# EAGLE board CT_schematic (EAGLE 7.6.0)

Size 100 x 80 mm. Coordinates in mm from the lower left corner, seen from the top.
Outline: 0,0 100,0 100,80 0,80 0,0
Copper layers (1*16): Top 0.035mm / dielectric 1.5mm / Bottom 0.035mm
Design rules "default": minimum track width 10mil, minimum drill 24mil, track to track 8mil, track to pad 8mil, pad to pad 8mil, via to via 8mil, smd to smd 8mil, copper to edge 40mil, drill to drill 8mil, minimum pad ring 10mil, minimum via ring 8mil, stop-mask expansion 4mil, vias tented up to drill 0mil, thermal gap 10mil

## Footprints (pad centres in the part's own frame; a part is rotated, then mirrored left to right if it is on the bottom)
C0603 = smd 0.8 x 0.8: 1 -0.762,0; 2 0.762,0
C0402 = smd 0.5 x 0.5: 1 -0.508,0; 2 0.508,0
C1210 = smd 1.2 x 2.5: 1 -1.524,0; 2 1.524,0
C0805 = smd 1.2 x 1.3: 1 -1.016,0; 2 1.016,0
EXV-9H = smd 3.505 x 1.676: 1 -2.857,0; 2 2.857,0
L0603 = smd 0.8 x 0.8: 1 -0.762,0; 2 0.762,0
PJ-037B_PACKAGE = drill 3.7 square: 1 12,0 | drill 3.2 square: 2 6,0
R0603 = smd 0.8 x 0.8: 1 -0.762,0; 2 0.762,0
LQFP100 = smd 0.3 x 1.2: 1 -6,-7.75; 2 -5.5,-7.75; 3 -5,-7.75; 4 -4.5,-7.75; 5 -4,-7.75; 6 -3.5,-7.75; 7 -3,-7.75; 8 -2.5,-7.75; 9 -2,-7.75; 10 -1.5,-7.75; 11 -1,-7.75; 12 -0.5,-7.75; 13 0,-7.75; 14 0.5,-7.75; 15 1,-7.75; 16 1.5,-7.75; 17 2,-7.75; 18 2.5,-7.75; 19 3,-7.75; 20 3.5,-7.75; 21 4,-7.75; 22 4.5,-7.75; 23 5,-7.75; 24 5.5,-7.75; 25 6,-7.75; 51 6,7.75; 52 5.5,7.75; 53 5,7.75; 54 4.5,7.75; 55 4,7.75; 56 3.5,7.75; 57 3,7.75; 58 2.5,7.75; 59 2,7.75; 60 1.5,7.75; 61 1,7.75; 62 0.5,7.75; 63 0,7.75; 64 -0.5,7.75; 65 -1,7.75; 66 -1.5,7.75; 67 -2,7.75; 68 -2.5,7.75; 69 -3,7.75; 70 -3.5,7.75; 71 -4,7.75; 72 -4.5,7.75; 73 -5,7.75; 74 -5.5,7.75; 75 -6,7.75 | smd 1.2 x 0.3: 26 7.75,-6; 27 7.75,-5.5; 28 7.75,-5; 29 7.75,-4.5; 30 7.75,-4; 31 7.75,-3.5; 32 7.75,-3; 33 7.75,-2.5; 34 7.75,-2; 35 7.75,-1.5; 36 7.75,-1; 37 7.75,-0.5; 38 7.75,0; 39 7.75,0.5; 40 7.75,1; 41 7.75,1.5; 42 7.75,2; 43 7.75,2.5; 44 7.75,3; 45 7.75,3.5; 46 7.75,4; 47 7.75,4.5; 48 7.75,5; 49 7.75,5.5; 50 7.75,6; 76 -7.75,6; 77 -7.75,5.5; 78 -7.75,5; 79 -7.75,4.5; 80 -7.75,4; 81 -7.75,3.5; 82 -7.75,3; 83 -7.75,2.5; 84 -7.75,2; 85 -7.75,1.5; 86 -7.75,1; 87 -7.75,0.5; 88 -7.75,0; 89 -7.75,-0.5; 90 -7.75,-1; 91 -7.75,-1.5; 92 -7.75,-2; 93 -7.75,-2.5; 94 -7.75,-3; 95 -7.75,-3.5; 96 -7.75,-4; 97 -7.75,-4.5; 98 -7.75,-5; 99 -7.75,-5.5; 100 -7.75,-6
SOIC-8 = smd 1.6 x 0.6: 1 -2.7,1.905 | smd 1.55 x 0.6: 2 -2.7,0.635; 3 -2.7,-0.635; 4 -2.7,-1.905; 5 2.7,-1.905; 6 2.7,-0.635; 7 2.7,0.635; 8 2.7,1.905
QFN-32 = smd 0.6 x 0.3: 1 -2.3,1.75; 2 -2.3,1.25; 3 -2.3,0.75; 4 -2.3,0.25; 5 -2.3,-0.25; 6 -2.3,-0.75; 7 -2.3,-1.25; 8 -2.3,-1.75; 17 2.3,-1.75; 18 2.3,-1.25; 19 2.3,-0.75; 20 2.3,-0.25; 21 2.3,0.25; 22 2.3,0.75; 23 2.3,1.25; 24 2.3,1.75 | smd 0.3 x 0.6: 9 -1.75,-2.3; 10 -1.25,-2.3; 11 -0.75,-2.3; 12 -0.25,-2.3; 13 0.25,-2.3; 14 0.75,-2.3; 15 1.25,-2.3; 16 1.75,-2.3; 25 1.75,2.3; 26 1.25,2.3; 27 0.75,2.3; 28 0.25,2.3; 29 -0.25,2.3; 30 -0.75,2.3; 31 -1.25,2.3; 32 -1.75,2.3 | smd 3.2 x 3.2: EXP 0,0
SJ-43515TS-SMT-TR = smd 2.2 x 3: 1 0.6,-7.4; 4 3.4,-7.4 | smd 3 x 3: 2 12.8,-7.4; 5 17,-3 | smd 2 x 3: 3 5.3,0; 6 2.5,0 | drill 1.8: P$7 4.5,-3.69; P$8 11.54,-3.69
WM-64PC = drill 0.6 pad 1: 1 -1,0.95; 2 -1,-0.95
SSOP-28 = smd 1.5 x 0.4: 1 -3.625,4.225; 2 -3.625,3.575; 3 -3.625,2.925; 4 -3.625,2.275; 5 -3.625,1.625; 6 -3.625,0.975; 7 -3.625,0.325; 8 -3.625,-0.325; 9 -3.625,-0.975; 10 -3.625,-1.625; 11 -3.625,-2.275; 12 -3.625,-2.925; 13 -3.625,-3.575; 14 -3.625,-4.225; 15 3.625,-4.225; 16 3.625,-3.575; 17 3.625,-2.925; 18 3.625,-2.275; 19 3.625,-1.625; 20 3.625,-0.975; 21 3.625,-0.325; 22 3.625,0.325; 23 3.625,0.975; 24 3.625,1.625; 25 3.625,2.275; 26 3.625,2.925; 27 3.625,3.575; 28 3.625,4.225
HTSS-105-01-G-D = drill 1 pad 1.8 square: 1 0,0 | drill 1 pad 1.8: 2 0,2.54; 3 2.54,0; 4 2.54,2.54; 5 5.08,0; 6 5.08,2.54; 7 7.62,0; 8 7.62,2.54; 9 10.16,0; 10 10.16,2.54
QFN-28 = smd 0.813 x 0.305: 1 -2.451,1.5; 2 -2.451,1; 3 -2.451,0.5; 4 -2.451,0; 5 -2.451,-0.5; 6 -2.451,-1; 7 -2.451,-1.5; 15 2.451,-1.5; 16 2.451,-1; 17 2.451,-0.5; 18 2.451,0; 19 2.451,0.5; 20 2.451,1; 21 2.451,1.5 | smd 0.305 x 0.813: 8 -1.5,-2.451; 9 -1,-2.451; 10 -0.5,-2.451; 11 0,-2.451; 12 0.5,-2.451; 13 1,-2.451; 14 1.5,-2.451; 22 1.5,2.451; 23 1,2.451; 24 0.5,2.451; 25 0,2.451; 26 -0.5,2.451; 27 -1,2.451; 28 -1.5,2.451 | smd 3.607 x 3.607: 29 0,0
ASEK = smd 1.4 x 1: 1 -1.1,-0.8; 2 1.1,-0.8; 3 1.1,0.8; 4 -1.1,0.8
ASFL1 = smd 1.7 x 1.5: 1 -1.27,-1.1; 2 1.27,-1.1; 3 1.27,1.1; 4 -1.27,1.1
WSON-8 = smd 0.3 x 0.6: 1 -0.75,0; 2 0.05,0; 3 0.85,0; 4 1.65,0; 5 1.65,3.8; 6 0.85,3.8; 7 0.05,3.8; 8 -0.75,3.8 | smd 3 x 2.6: PAD 0.45,1.9
SON-6 = smd 0.55 x 0.3: 1 -0.355,0.5 | smd 0.52 x 0.3: 2 -0.37,0; 3 -0.37,-0.5; 4 0.37,-0.5; 5 0.37,0; 6 0.37,0.5
SW_4-1437565-2 = smd 1.4 x 2.1: 1 -2.23,4.55; 2 -2.23,-4.55; 3 2.23,4.55; 4 2.23,-4.55
LGM67K-G1J2-24-Z = smd 0.8 x 1.4: A -2,0; C 0,0
NC7SZ125M5X = smd 1.3 x 0.7: 1 -1.3,0.95; 2 -1.3,0; 3 -1.3,-0.95; 4 1.3,-0.95; 5 1.3,0.95

## Placement (x,y rotation side)
C1  1e-06  [C0603]  -81.28,85.09 0 top  (outside the outline)
C2  1e-07  [C0603]  -85.09,85.09 0 top  (outside the outline)
C3  1e-07  [C0603]  -88.9,85.09 0 top  (outside the outline)
C4  1e-07  [C0603]  -15.24,90.17 0 top  (outside the outline)
C5  1e-07  [C0603]  -19.05,90.17 0 top  (outside the outline)
C6  1e-07  [C0603]  -22.86,90.17 0 top  (outside the outline)
C7  1e-07  [C0603]  -26.67,90.17 0 top  (outside the outline)
C8  4.7e-06  [C0603]  -69.85,85.09 0 top  (outside the outline)
C9  2.2e-06  [C0603]  -73.66,85.09 0 top  (outside the outline)
C10  2.2e-06  [C0603]  -77.47,85.09 0 top  (outside the outline)
C11  1e-08  [C0603]  -30.48,90.17 0 top  (outside the outline)
C12  1e-06  [C0603]  -34.29,90.17 0 top  (outside the outline)
C13  1e-08  [C0402]  -38.1,95.25 0 top  (outside the outline)
C14  1e-06  [C0603]  -38.1,90.17 0 top  (outside the outline)
C15  1e-06  [C0603]  -41.91,90.17 0 top  (outside the outline)
C16  1e-06  [C0603]  -45.72,90.17 0 top  (outside the outline)
C17  1e-06  [C0603]  -49.53,90.17 0 top  (outside the outline)
C18  1e-06  [C0603]  -53.34,90.17 0 top  (outside the outline)
C19  1e-06  [C0603]  -57.15,90.17 0 top  (outside the outline)
C20  1e-06  [C0603]  -60.96,90.17 0 top  (outside the outline)
C21  1e-07  [C0402]  -41.91,95.25 0 top  (outside the outline)
C22  1e-07  [C0402]  -45.72,95.25 0 top  (outside the outline)
C23  1e-07  [C0402]  -49.53,95.25 0 top  (outside the outline)
C24  1e-07  [C0402]  -53.34,95.25 0 top  (outside the outline)
C25  1e-06  [C0603]  -64.77,90.17 0 top  (outside the outline)
C26  1e-07  [C0402]  -57.15,95.25 0 top  (outside the outline)
C27  1e-07  [C0402]  -60.96,95.25 0 top  (outside the outline)
C28  1e-07  [C0402]  -64.77,95.25 0 top  (outside the outline)
C29  1e-07  [C0402]  -68.58,95.25 0 top  (outside the outline)
C30  1e-07  [C0402]  -72.39,95.25 0 top  (outside the outline)
C31  2.2e-05  [C1210]  -24.13,80.01 0 top  (outside the outline)
C32  2.2e-05  [C1210]  -30.48,80.01 0 top  (outside the outline)
C33  1e-09  [C0402]  -76.2,95.25 0 top  (outside the outline)
C34  1e-09  [C0402]  -80.01,95.25 0 top  (outside the outline)
C35  1e-07  [C0402]  -83.82,95.25 0 top  (outside the outline)
C36  1e-07  [C0402]  -87.63,95.25 0 top  (outside the outline)
C37  1e-07  [C0402]  -91.44,95.25 0 top  (outside the outline)
C38  1e-07  [C0402]  -15.24,100.33 0 top  (outside the outline)
C39  1e-07  [C0402]  -19.05,100.33 0 top  (outside the outline)
C40  1e-05  [C0805]  -60.96,80.01 0 top  (outside the outline)
C41  1e-05  [C0805]  -66.04,80.01 0 top  (outside the outline)
C42  1e-05  [C0805]  -71.12,80.01 0 top  (outside the outline)
C43  1e-05  [C0805]  -76.2,80.01 0 top  (outside the outline)
C44  1e-05  [C0805]  -81.28,80.01 0 top  (outside the outline)
C45  1e-08  [C0402]  -22.86,100.33 0 top  (outside the outline)
C46  1e-08  [C0402]  -26.67,100.33 0 top  (outside the outline)
C47  1e-08  [C0402]  -30.48,100.33 0 top  (outside the outline)
C48  1e-08  [C0402]  -34.29,100.33 0 top  (outside the outline)
C49  1e-08  [C0402]  -38.1,100.33 0 top  (outside the outline)
C50  1e-05  [C1210]  -36.83,80.01 0 top  (outside the outline)
C51  1e-05  [C0805]  -86.36,80.01 0 top  (outside the outline)
C52  1e-08  [C0402]  -41.91,100.33 0 top  (outside the outline)
C53  1e-05  [C1210]  -43.18,80.01 0 top  (outside the outline)
C54  1e-05  [C1210]  -49.53,80.01 0 top  (outside the outline)
C55  1e-07  [C0402]  -45.72,100.33 0 top  (outside the outline)
C56  0.0001  [EXV-9H]  -55.88,71.12 0 top  (outside the outline)
C57  0.0001  [EXV-9H]  -67.31,71.12 0 top  (outside the outline)
C58  1e-08  [C0402]  -49.53,100.33 0 top  (outside the outline)
F1  240.0  [L0603]  -68.58,90.17 0 top  (outside the outline)
J1  PJ-037B  [PJ-037B_PACKAGE]  -83.82,38.1 0 top  (outside the outline)
R2  1000.0  [R0603]  -72.39,90.17 0 top  (outside the outline)
R4  4700.0  [R0603]  -76.2,90.17 0 top  (outside the outline)
R5  2200.0  [R0603]  -80.01,90.17 0 top  (outside the outline)
R6  2200.0  [R0603]  -83.82,90.17 0 top  (outside the outline)
R7  10000.0  [R0603]  -35.56,85.09 0 top  (outside the outline)
R8  10000.0  [R0603]  -40.64,85.09 0 top  (outside the outline)
R9  1270.0  [R0603]  -87.63,90.17 0 top  (outside the outline)
R10  1270.0  [R0603]  -91.44,90.17 0 top  (outside the outline)
R11  100000.0  [R0603]  -91.44,78.74 0 top  (outside the outline)
R12  47000.0  [R0603]  -45.72,85.09 0 top  (outside the outline)
R13  47000.0  [R0603]  -50.8,85.09 0 top  (outside the outline)
R14  47000.0  [R0603]  -55.88,85.09 0 top  (outside the outline)
R15  680.0  [R0603]  -15.24,95.25 0 top  (outside the outline)
R16  100000.0  [R0603]  -15.24,85.09 0 top  (outside the outline)
R17  200.0  [R0603]  -19.05,95.25 0 top  (outside the outline)
R18  1000.0  [R0603]  -22.86,95.25 0 top  (outside the outline)
R19  100000.0  [R0603]  -20.32,85.09 0 top  (outside the outline)
R20  2231.0  [R0603]  -26.67,95.25 0 top  (outside the outline)
R21  1000.0  [R0603]  -30.48,95.25 0 top  (outside the outline)
R22  10000.0  [R0603]  -60.96,85.09 0 top  (outside the outline)
R23  10000.0  [R0603]  -66.04,85.09 0 top  (outside the outline)
R24  9100.0  [R0603]  -34.29,95.25 0 top  (outside the outline)
R25  680000.0  [R0603]  -25.4,85.09 0 top  (outside the outline)
R26  120000.0  [R0603]  -30.48,85.09 0 top  (outside the outline)
U1  STM32F401VBT6  [LQFP100]  -24.13,8.89 0 top  (outside the outline)
U2  M24M02-DRMN6TP  [SOIC-8]  -90.17,50.8 0 top  (outside the outline)
U3  SGTL5000XNAA3  [QFN-32]  -53.34,50.8 0 top  (outside the outline)
U4  SJ-43515TS-SMT-TR  [SJ-43515TS-SMT-TR]  -71.12,10.16 0 top  (outside the outline)
U5  SJ-43515TS-SMT-TR  [SJ-43515TS-SMT-TR]  -39.37,26.67 0 top  (outside the outline)
U6  SJ-43515TS-SMT-TR  [SJ-43515TS-SMT-TR]  -67.31,26.67 0 top  (outside the outline)
U7  WM-64PCT  [WM-64PC]  -39.37,50.8 0 top  (outside the outline)
U8  ST3241EBPR  [SSOP-28]  -39.37,7.62 0 top  (outside the outline)
U9  HTSS-105-01-G-D  [HTSS-105-01-G-D]  -73.66,49.53 0 top  (outside the outline)
U10  WM8731CLSEFL  [QFN-28]  -16.51,80.01 0 top  (outside the outline)
U11  SJ-43515TS-SMT-TR  [SJ-43515TS-SMT-TR]  -39.37,40.64 0 top  (outside the outline)
U12  SJ-43515TS-SMT-TR  [SJ-43515TS-SMT-TR]  -67.31,40.64 0 top  (outside the outline)
U13  ASEK-32.768KHz-ECST  [ASEK]  -46.99,71.12 0 top  (outside the outline)
U14  ASFL1-12.288MHZ-EC-T  [ASFL1]  -71.12,62.23 0 top  (outside the outline)
U15  ASFL-24.57MHZ-NCS  [ASFL1]  -88.9,62.23 0 top  (outside the outline)
U16  ASFL1-25MHZ-NCS  [ASFL1]  -26.67,72.39 0 top  (outside the outline)
U17  LP3878SDX-ADJ/NOPB  [WSON-8]  -30.48,60.96 0 top  (outside the outline)
U18  LP3878SDX-ADJ/NOPB  [WSON-8]  -50.8,60.96 0 top  (outside the outline)
U19  TPS3895ADRYR  [SON-6]  -52.07,99.06 0 top  (outside the outline)
U20  4-1437565-2  [SW_4-1437565-2]  -27.94,52.07 0 top  (outside the outline)
U21  Q65110A2395  [LGM67K-G1J2-24-Z]  -77.47,71.12 0 top  (outside the outline)
U22  nc7sz125m5x  [NC7SZ125M5X]  -54.61,78.74 0 top  (outside the outline)

## Library data of the parts
C1-C58 F1 J1 R2 R4-R26 U1-U22 = circuit_tree

## Nets
CLK_U1_8: U1.8 U13.3
CLK_U1_12: U1.12 U16.3
CLK_U3_21: U3.21 U15.3
CLK_U10_1: U10.1 U14.3
GND: C1.2 C2.2 C3.2 C4.2 C5.2 C6.2 C7.2 C8.2 C9.2 C10.2 C11.2 C12.2 C13.2 C21.2 C22.2 C23.2 C24.2 C25.2 C26.2 C29.2 C30.2 C34.2 C35.2 C36.2 C37.2 C38.2 C39.2 C40.2 C41.2 C42.2 C43.2 C44.2 C45.2 C46.2 C47.2 C48.2 C49.2 C50.2 C51.2 C52.2 C53.2 C54.2 C55.2 C56.2 C57.2 C58.2 J1.2 R2.2 R7.2 R8.2 R10.2 R12.2 R13.2 R14.2 R18.2 R21.2 R24.2 R26.2 U1.10 U1.20 U1.27 U1.49 U1.74 U1.99 U2.4 U3.1 U3.3 U3.7 U3.EXP U5.1 U6.1 U7.2 U8.23 U8.25 U9.9 U10.4 U10.15 U10.19 U10.25 U10.26 U10.29 U11.1 U12.1 U13.2 U14.2 U15.2 U16.2 U17.3 U17.PAD U18.3 U18.PAD U19.2 U21.C U22.1 U22.3
NET_U1_14: R4.1 U1.14 U22.4
NET_U1_22: C11.1 C12.1 F1.1 U1.21 U1.22
NET_U1_48: C9.1 U1.48
NET_U1_73: C10.1 U1.73
NET_U1_92: R5.1 U1.92 U2.6
NET_U1_93: R6.1 U1.93 U2.5
NET_U1_94: R7.1 U1.94
NET_U1_97: U21.A
NET_U1_98: U20.3 U20.4
NET_U2_3: R8.1 U2.3
NET_U3_10: C24.1 U3.10
NET_U3_29: R9.1 U3.29
NET_U3_31: R10.1 U3.31
NET_U4_1: U3.4 U4.1
NET_U4_2: U3.2 U4.2
NET_U4_5: U3.6 U4.5
NET_U5_2: C15.1 U5.2
NET_U5_5: C14.1 U5.5
NET_U5_11: C15.2
NET_U5_12: C14.2
NET_U6_2: C17.1 C18.1 U6.2
NET_U6_5: C16.1 U6.5
NET_U6_13: C17.2 C18.2
NET_U6_14: C16.2
NET_U7_1: C19.1 C20.1 C25.1 U3.16 U7.1
NET_U7_15: C19.2 C20.2
NET_U8_1: C28.1 U8.1
NET_U8_2: C28.2 U8.2
NET_U8_3: C30.1 U8.3
NET_U8_22: R11.1 U8.22
NET_U8_24: C27.2 U8.24
NET_U8_27: C29.1 U8.27
NET_U8_28: C27.1 U8.28
NET_U9_3: U8.4 U9.3
NET_U9_4: U8.5 U9.4
NET_U9_5: U8.9 U9.5
NET_U9_6: U8.10 U9.6
NET_U10_9: U10.9
NET_U10_20: C39.1 C44.1 U10.20
NET_U11_2: C32.1 R13.1 U11.2
NET_U11_5: C31.1 R12.1 U11.5
NET_U11_13: C31.2
NET_U11_14: C32.2
NET_U12_5: C33.1 C34.1 R14.1 R15.1 U12.5
NET_U12_21: R15.2
NET_U12_22: C33.2
NET_U17_1: C49.1 U17.1
NET_U17_6: R17.2 R18.1 U17.6
NET_U17_8: R16.1 U17.8
NET_U18_1: C52.1 U18.1
NET_U18_6: R20.2 R21.1 U18.6
NET_U18_8: R19.1 U18.8
NET_U19_1: R23.1 R24.1 U19.1
NET_U19_3: R25.2 R26.1 U19.3
NET_U19_4: R22.1 U19.4 U22.2
NET_U20_1: R2.1 U20.1 U20.2
PROC_I2S2_CK: U1.47 U10.7
PROC_I2S2_EXT_SD: U1.17 U10.10
PROC_I2S2_SD: U1.18 U10.8
PROC_I2S2_WS: U1.51 U10.9 U10.11
PROC_I2S3_CK: U1.78 U3.24
PROC_I2S3_EXT_SD: U1.79 U3.25
PROC_I2S3_SD: U1.80 U3.26
PROC_I2S3_WS: U1.29 U3.23
PROC_USART1_CTS: U1.70 U8.13
PROC_USART1_RTS: U1.71 U8.18
PROC_USART1_RX: U1.69 U8.19
PROC_USART1_TX: U1.68 U8.14
VCC_S1_13V6: C50.1 C53.1 C56.1 C57.1 J1.1 R16.2 R19.2 U17.4 U18.4
VCC_TIER1_1V2: C21.1 C51.1 R17.1 U3.30 U17.5
VCC_TIER1_3V3: C1.1 C2.1 C3.1 C4.1 C5.1 C6.1 C7.1 C8.1 C13.1 C22.1 C23.1 C26.1 C35.1 C36.1 C37.1 C38.1 C40.1 C41.1 C42.1 C43.1 C45.1 C46.1 C47.1 C48.1 C54.1 C55.1 C58.1 F1.2 R4.2 R5.2 R6.2 R9.2 R11.2 R20.1 R22.2 R23.2 R25.1 U1.6 U1.11 U1.19 U1.28 U1.50 U1.75 U1.100 U2.8 U3.5 U3.20 U8.26 U10.3 U10.5 U10.12 U10.18 U13.4 U14.4 U15.4 U16.4 U18.5 U19.6 U22.5

## Tracks (layer width: path | path; a pad name or v marks a point on that pad's centre or on a via)
CLK_U1_8  (1 unrouted)
CLK_U1_12  (1 unrouted)
CLK_U3_21  (1 unrouted)
CLK_U10_1  (1 unrouted)
GND  (94 unrouted)
NET_U1_14  (2 unrouted)
NET_U1_22  (4 unrouted)
NET_U1_48  (1 unrouted)
NET_U1_73  (1 unrouted)
NET_U1_92  (2 unrouted)
NET_U1_93  (2 unrouted)
NET_U1_94  (1 unrouted)
NET_U1_98  (1 unrouted)
NET_U2_3  (1 unrouted)
NET_U3_10  (1 unrouted)
NET_U3_29  (1 unrouted)
NET_U3_31  (1 unrouted)
NET_U4_1  (1 unrouted)
NET_U4_2  (1 unrouted)
NET_U4_5  (1 unrouted)
NET_U5_2  (1 unrouted)
NET_U5_5  (1 unrouted)
NET_U6_2  (2 unrouted)
NET_U6_5  (1 unrouted)
NET_U6_13  (1 unrouted)
NET_U7_1  (4 unrouted)
NET_U7_15  (1 unrouted)
NET_U8_1  (1 unrouted)
NET_U8_2  (1 unrouted)
NET_U8_3  (1 unrouted)
NET_U8_22  (1 unrouted)
NET_U8_24  (1 unrouted)
NET_U8_27  (1 unrouted)
NET_U8_28  (1 unrouted)
NET_U9_3  (1 unrouted)
NET_U9_4  (1 unrouted)
NET_U9_5  (1 unrouted)
NET_U9_6  (1 unrouted)
NET_U10_20  (2 unrouted)
NET_U11_2  (2 unrouted)
NET_U11_5  (2 unrouted)
NET_U12_5  (4 unrouted)
NET_U17_1  (1 unrouted)
NET_U17_6  (2 unrouted)
NET_U17_8  (1 unrouted)
NET_U18_1  (1 unrouted)
NET_U18_6  (2 unrouted)
NET_U18_8  (1 unrouted)
NET_U19_1  (2 unrouted)
NET_U19_3  (2 unrouted)
NET_U19_4  (2 unrouted)
NET_U20_1  (2 unrouted)
PROC_I2S2_CK  (1 unrouted)
PROC_I2S2_EXT_SD  (1 unrouted)
PROC_I2S2_SD  (1 unrouted)
PROC_I2S2_WS  (2 unrouted)
PROC_I2S3_CK  (1 unrouted)
PROC_I2S3_EXT_SD  (1 unrouted)
PROC_I2S3_SD  (1 unrouted)
PROC_I2S3_WS  (1 unrouted)
PROC_USART1_CTS  (1 unrouted)
PROC_USART1_RTS  (1 unrouted)
PROC_USART1_RX  (1 unrouted)
PROC_USART1_TX  (1 unrouted)
VCC_S1_13V6  (8 unrouted)
VCC_TIER1_1V2  (4 unrouted)
VCC_TIER1_3V3  (58 unrouted)